# EAGLE board Girraffe V3 (EAGLE 7.7.0)
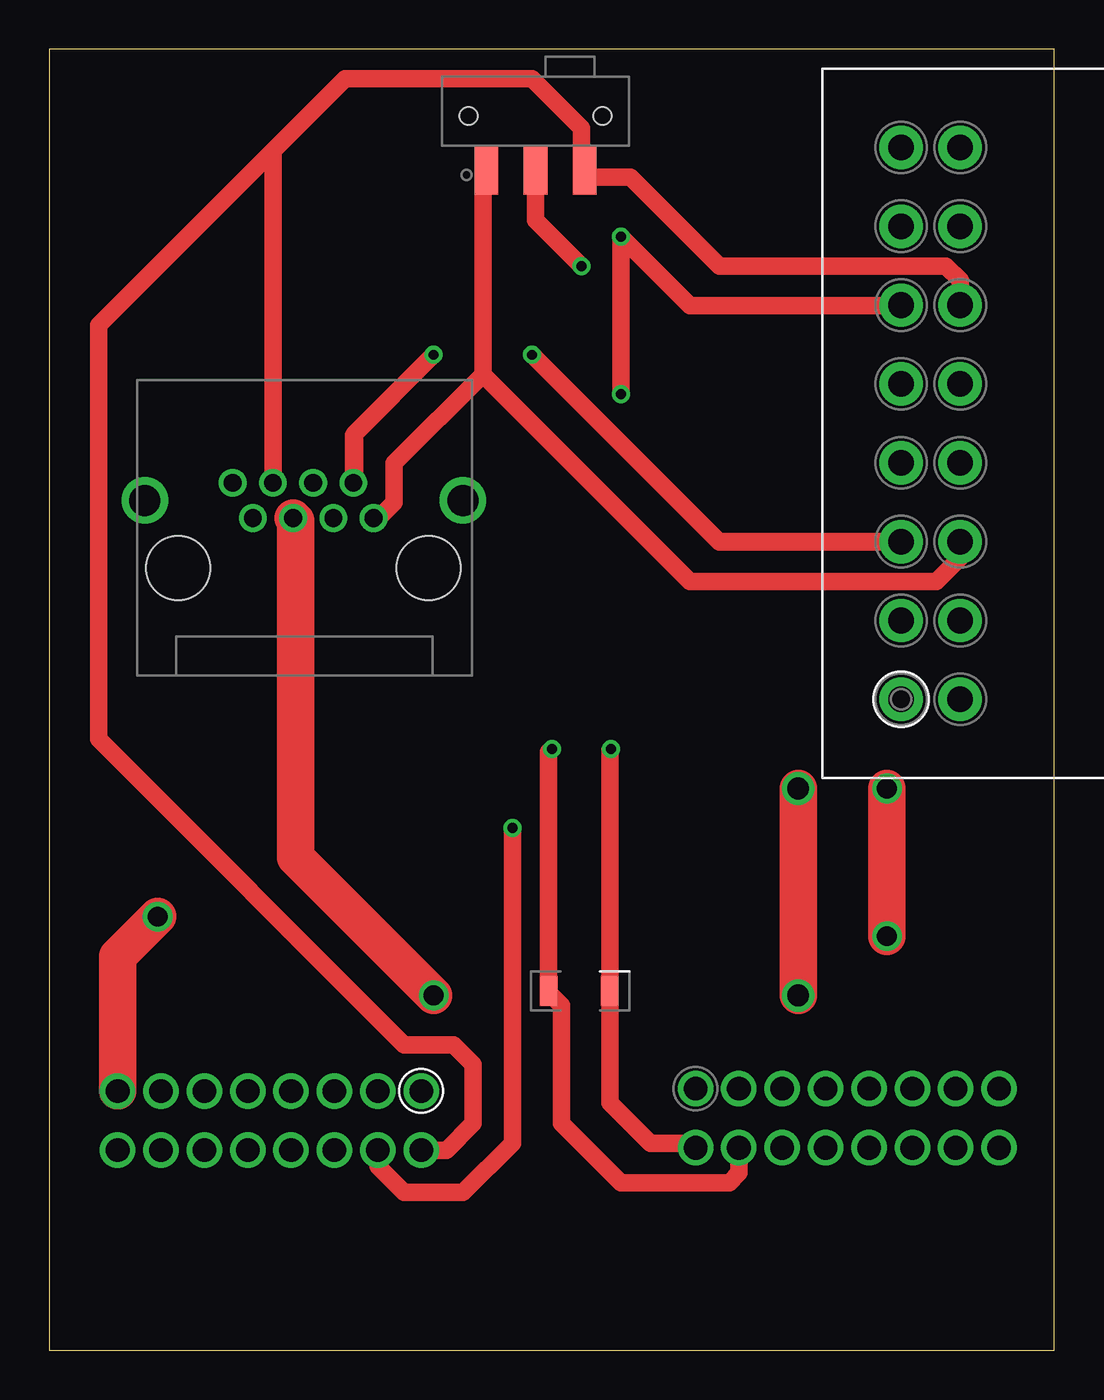
[diagram p0: board, top side]
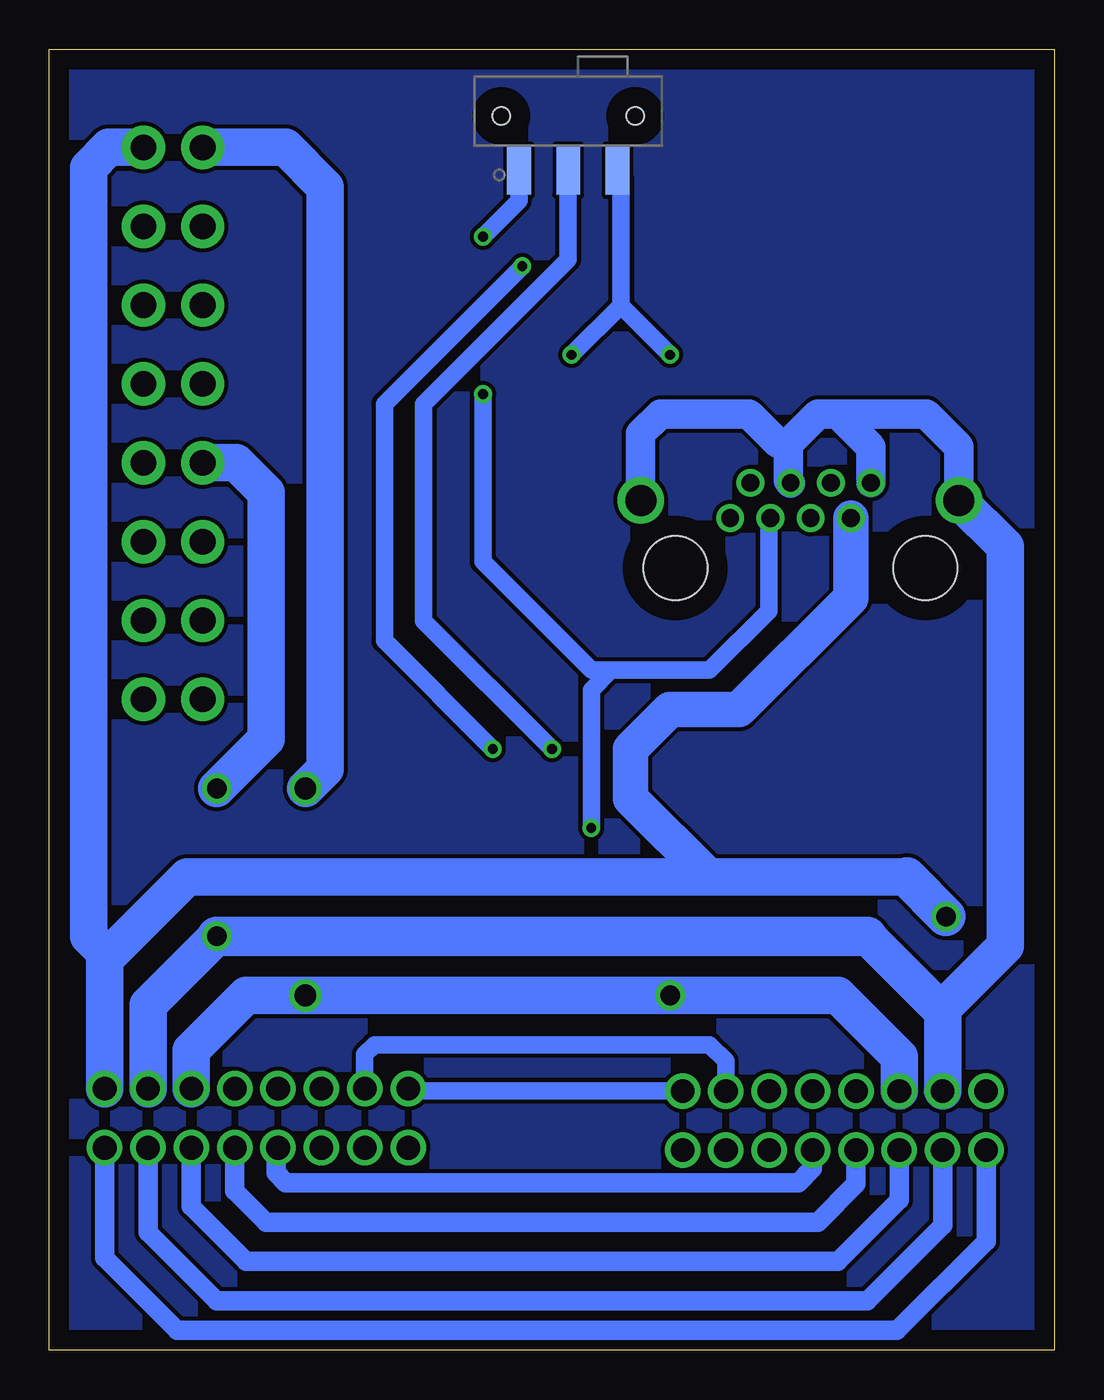
[diagram p1: board, bottom side, seen from below]

Size 51 x 66 mm. Coordinates in mm from the lower left corner, seen from the top.
Outline: 0,0 51,0 51,66 0,66 0,0
Copper layers (1*16): Top 0.035mm / dielectric 1.5mm / Bottom 0.035mm
Design rules "default": minimum track width 10mil, minimum drill 24mil, track to track 8mil, track to pad 8mil, pad to pad 8mil, via to via 8mil, smd to smd 8mil, copper to edge 40mil, drill to drill 8mil, minimum pad ring 10mil, minimum via ring 8mil, stop-mask expansion 4mil, vias tented up to drill 0mil, thermal gap 10mil

## Footprints (pad centres in the part's own frame; a part is rotated, then mirrored left to right if it is on the bottom)
120OHM = smd 0.9 x 1.5: 1 0,0; 2 3.1,0
OBDII = drill 1.3 pad 2.2: 1 0,0; 2 0,-4; 3 0,-8; 4 0,-12; 5 0,-16; 6 0,-20; 7 0,-24; 8 0,-28; 9 -3,0; 10 -3,-4; 11 -3,-8; 12 -3,-12; 13 -3,-16; 14 -3,-20; 15 -3,-24; 16 -3,-28
R137 = drill 1.2: 1 0,0; 2 -2.2,0; 3 -4.4,0; 4 -6.6,0; 5 -8.8,0; 6 -11,0; 7 -13.2,0; 8 -15.4,0; 9 0,-3; 10 -2.2,-3; 11 -4.4,-3; 12 -6.6,-3; 13 -8.8,-3; 14 -11,-3; 15 -13.2,-3; 16 -15.4,-3
R137OUT = drill 1.2: 1 0,0; 2 2.2,0; 3 4.4,0; 4 6.6,0; 5 8.8,0; 6 11,0; 7 13.2,0; 8 15.4,0; 9 0,-3; 10 2.2,-3; 11 4.4,-3; 12 6.6,-3; 13 8.8,-3; 14 11,-3; 15 13.2,-3; 16 15.4,-3
SLIDESWITCH = smd 1.2 x 2.5: 1 -2.5,0; 2 0,0; 3 2.5,0 | hole 0.9: 3.4,2.75; -3.4,2.75
VERRJ45 = drill 0.9: 12V -6.12,0; CAN1H -2.04,0; CAN1L -5.1,1.78; CAN2H -1.02,1.78; CAN2L 0,0; GND@1 -7.14,1.79; GND@5 -3.06,1.78; IGN -4.08,0 | drill 1.57: GND@9 -11.6,0.89; GND@10 4.54,0.89 | hole 3.25: 2.79,-2.54; -9.91,-2.54

## Placement (x,y rotation side)
U$1  120OHM  [120OHM]  28.44,18.23 180 top
U$2  OBDII90DEG  [OBDII]  43.22,33.02 180 top
U$3  R137IN  [R137]  18.87,13.15 0 top
U$4  R137OUT  [R137OUT]  32.79,13.27 0 top
U$5  SLIDESWITCH  [SLIDESWITCH]  24.67,59.87 0 top
U$6  SLIDESWITCH  [SLIDESWITCH]  24.67,59.87 0 bottom
U$7  RJ45UP  [VERRJ45]  16.45,42.22 0 top

## Library data of the parts
U$1-U$7 = Giraffe

## Nets
12V: U$2.16 U$3.8 U$4.8 U$7.12V
ACC: U$2.8 U$3.6 U$4.6 U$7.IGN
GND: U$2.4 U$3.7 U$4.7 U$7.GND@1 U$7.GND@5 U$7.GND@9 U$7.GND@10
N$1: U$1.1 U$4.9 U$5.2
N$2: U$1.2 U$4.10 U$6.2
N$3: U$2.14 U$3.9 U$5.3 U$7.CAN1L
N$4: U$2.11 U$5.1 U$7.CAN2L
N$5: U$2.6 U$3.10 U$6.1 U$7.CAN1H
N$6: U$2.3 U$6.3 U$7.CAN2H
N$7: U$3.16 U$4.16
N$8: U$3.15 U$4.15
N$9: U$3.14 U$4.14
N$10: U$3.13 U$4.13
N$11: U$3.12 U$4.12
N$12: U$3.2 U$4.2
N$13: U$3.1 U$4.1

## Tracks (layer width: path | path; a pad name or v marks a point on that pad's centre or on a via)
12V  (via drill 1)
  Top 1.9: U$3.8 3.47,19.97 v5.5,22
  Bottom 1.8: U$7.12V 10.33,38.17 16,32.5 19.5,32.5 21.5,30.5 21.5,28 17.5,24
  Bottom 1.9: U$4.8 48.19,19.81 48,20 | 48,20 44,24 17.5,24 7.5,24 | U$2.16 47.98,61.02 49,60 49,21 48,20
  Bottom 2: 7.5,24 v5.5,22
ACC  (via drill 1, 1.1)
  Top 1.9: v19.5,18 12.5,25 12.5,42.09 U$7.IGN | v38,28.5 v38,18
  Bottom 1.9: U$3.6 7.87,14.87 11,18 v19.5,18 v38,18 41,18 43.79,15.21 U$4.6 | U$2.8 39.02,61.02 37,59 37,29.5 v38,28.5
GND  (via drill 1)
  Top 1.9: v42.5,28.5 v42.5,21
  Bottom 1.5: U$7.GND@9 4.85,45.85 6.5,47.5 11,47.5 | 11,47.5 12,47.5 13.5,46 | 13.5,46 13.5,44.11 U$7.GND@5 | 13.5,46 14,46 15.5,47.5 20,47.5 21,46.5 U$7.GND@10 | U$7.GND@1 9.31,45.81 11,47.5
  Bottom 1.9: U$3.7 5.67,17.17 | 5.67,17.17 9.5,21 | U$4.7 45.99,17.51 v42.5,21 | 5.67,17.17 5.67,17.33 2.5,20.5 2.5,40.76 U$7.GND@9 | U$2.4 41.52,45.02 40,43.5 40,31 v42.5,28.5
  Bottom 2: 9.5,21 v42.5,21
N$1  (via drill 0.5)
  Top 0.9: U$5.2 24.67,57.33 v27,55 | v28.5,30.5 28.44,30.44 U$1.1 28.44,12.56 30.5,10.5 32.56,10.5 U$4.9
  Bottom 0.9: v27,55 34,48 34,36 v28.5,30.5
N$2  (via drill 0.5)
  Top 0.9: v25.5,30.5 25.34,30.34 U$1.2 25.34,18.16 26,17.5 26,11.5 29,8.5 34.5,8.5 35,9 U$4.10
  Bottom 0.9: U$6.2 24.67,55.33 32,48 32,37 v25.5,30.5
N$3
  Top 0.9: U$7.CAN1L 11.35,60.85 | 11.35,60.85 15,64.5 24.5,64.5 27,62 27,60.04 U$5.3 27.54,59.5 29.5,59.5 34,55 45.5,55 46.22,54.28 U$2.14 | U$3.9 20.15,10.15 21.5,11.5 21.5,14.5 20.5,15.5 18,15.5 2.5,31 2.5,52 11.35,60.85
N$4
  Top 0.9: U$7.CAN2L 16.72,42.22 17.5,43 17.5,45 22,49.5 | 22,49.5 22,59.7 U$5.1 | U$2.11 46.22,40.22 45,39 32.5,39 22,49.5
N$5  (via drill 0.5)
  Top 0.9: U$3.10 16.67,9.33 18,8 21,8 23.5,10.5 v23.5,26.5 | U$2.6 43.2,53 32.5,53 v29,56.5 v29,48.5
  Bottom 0.9: U$6.1 27.17,58.33 v29,56.5 | 22.5,34.5 23.5,34.5 29,40 v29,48.5 | 22.5,34.5 17.5,34.5 14.5,37.5 14.5,42.13 U$7.CAN1H | v23.5,26.5 23.5,33.5 22.5,34.5
N$6  (via drill 0.5)
  Top 0.9: U$7.CAN2H 15.43,46.43 v19.5,50.5 15.5,46.5 15.5,44 | v24.5,50.5 34,41 43.2,41 U$2.3 33.98,41.02 v24.5,50.5
  Bottom 0.9: U$6.3 22.17,59.67 22,59.5 22,53 | v24.5,50.5 22,53 | 22,53 v19.5,50.5
N$7
  Bottom 1: U$3.16 3.47,5.53 8,1 44.5,1 48.19,4.69 U$4.16
N$8
  Bottom 1: U$3.15 5.67,6.33 9.5,2.5 42.5,2.5 45.99,5.99 U$4.15
N$9
  Bottom 1: U$3.14 7.87,7.63 11,4.5 41,4.5 43.79,7.29 U$4.14
N$10
  Bottom 1: U$3.13 10.07,8.43 12,6.5 40,6.5 41.59,8.09 U$4.13
N$11
  Bottom 1: U$3.12 12.27,9.23 13,8.5 39,8.5 39.5,9 39.5,10.16 U$4.12
N$12
  Bottom 0.9: U$3.2 16.67,14.67 17.5,15.5 34.5,15.5 35,15 U$4.2
N$13
  Bottom 0.9: U$3.1 32.67,13.15 U$4.1
N$14
  pour Bottom: 1,65 50,65 50,1 1,1 1,65 2,65